# EAGLE board AIO (EAGLE 9.2.2)
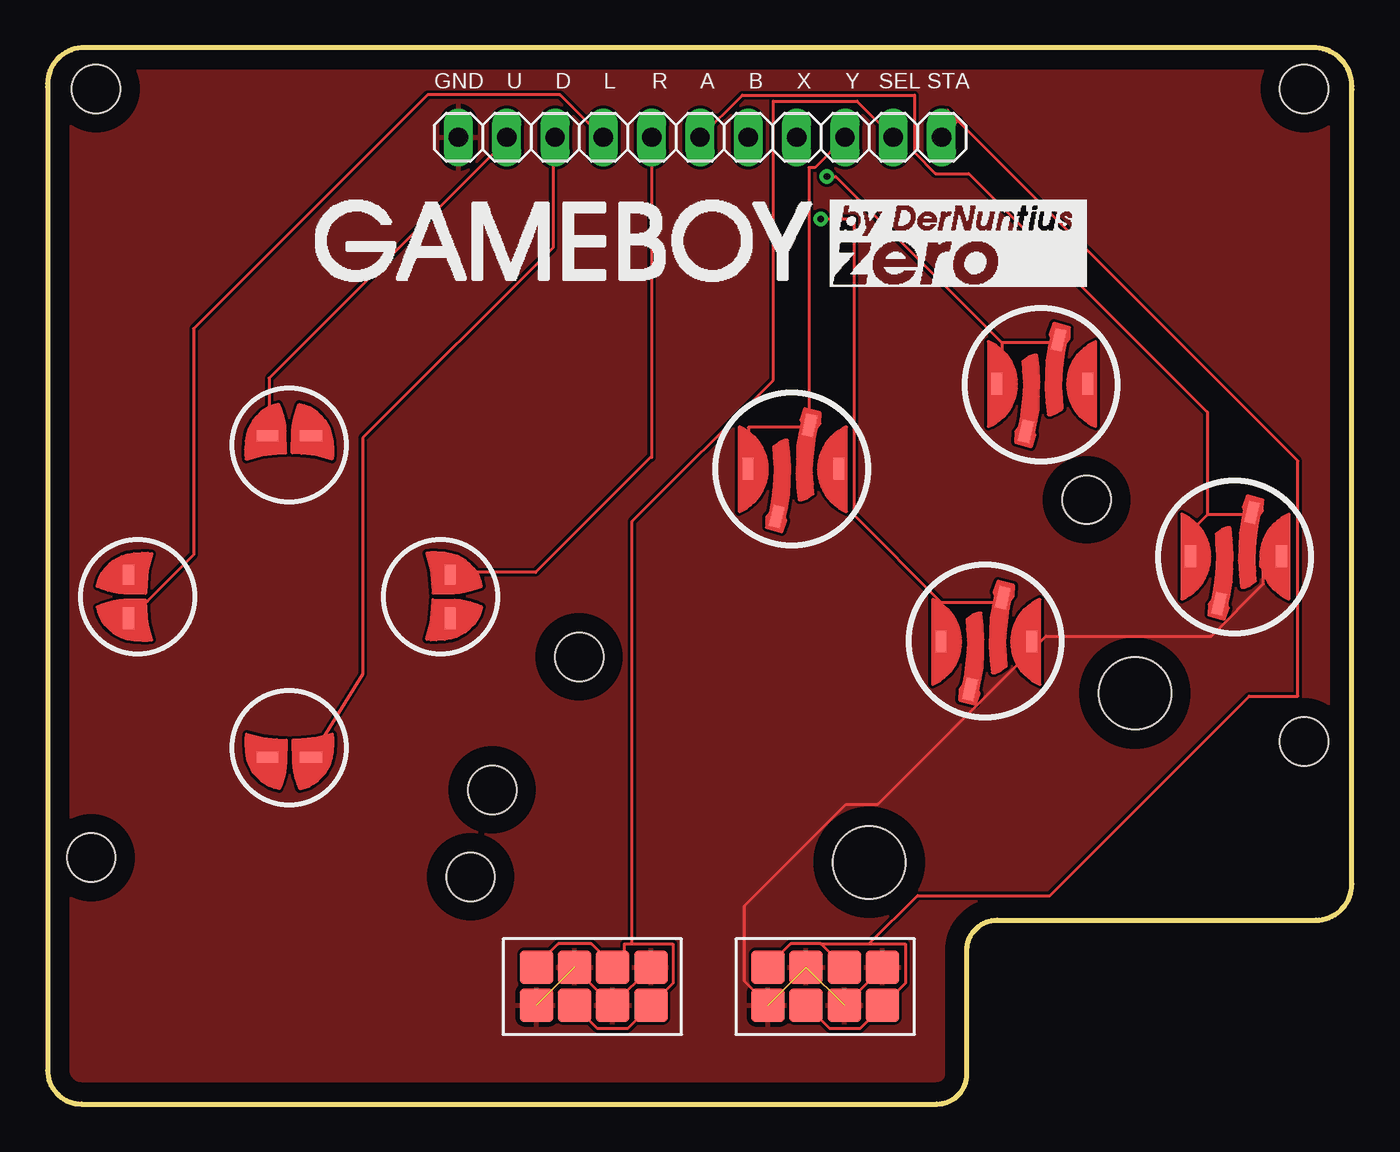
[diagram p0: board, top side]
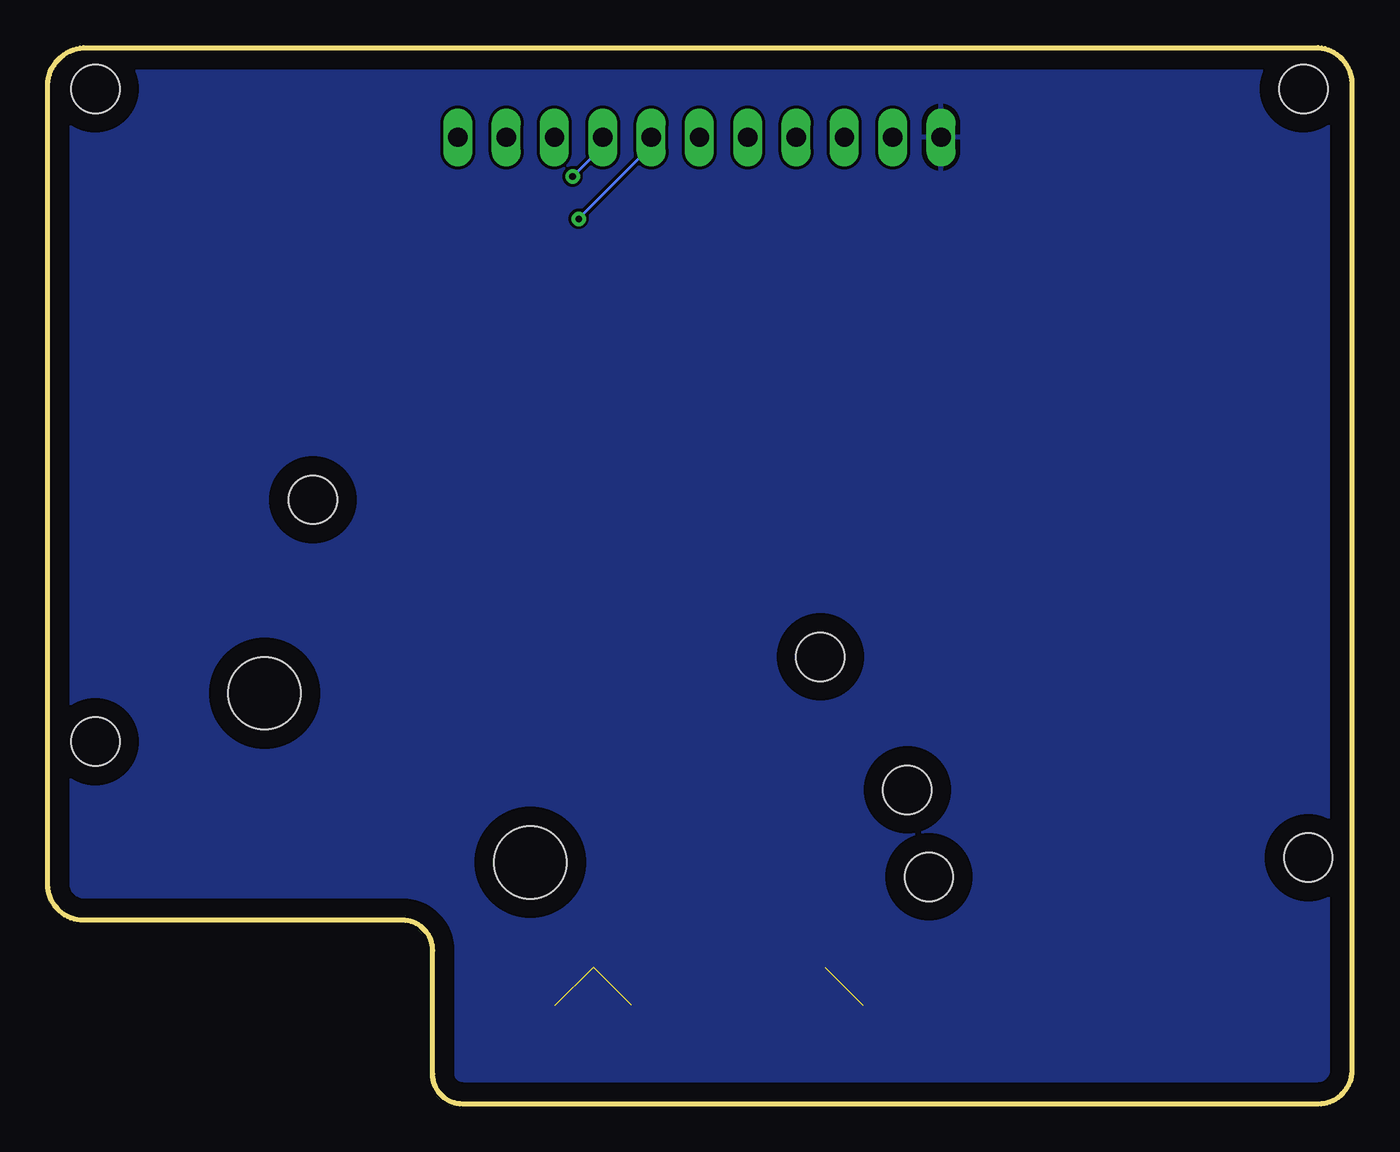
[diagram p1: board, bottom side, seen from below]

Size 68.56 x 55.51 mm. Coordinates in mm from the lower left corner, seen from the top.
Outline: 66.66,55.52 1.77,55.52 arc90 0.01,53.44 0.01,1.78 arc90 1.78,0 46.74,0 arc90 48.32,1.58 48.32,8.08 arc-90 49.9,9.66 66.67,9.66 arc90 68.56,11.55 68.56,53.32 arc90 66.66,55.52
Copper layers (1*16): Top 0.035mm / dielectric 1.5mm / Bottom 0.035mm
Design rules "default": minimum track width 6mil, minimum drill 0.35mm, track to track 6mil, track to pad 6mil, pad to pad 6mil, via to via 6mil, smd to smd 6mil, copper to edge 40mil, drill to drill 6mil, minimum pad ring 10mil, minimum via ring 8mil, stop-mask expansion 4mil, vias tented up to drill 0mil, thermal gap 10mil
Holes 2.54 mm at 22.23,11.94 2.29,12.95 23.37,16.51 66.05,19.05 54.62,31.75 2.55,53.34 66.05,53.34 27.95,23.5
Holes 3.81 mm at 43.19,12.7 57.16,21.59

## Footprints (pad centres in the part's own frame; a part is rotated, then mirrored left to right if it is on the bottom)
1X11 = drill 1.016 long: 1 -12.7,0; 2 -10.16,0; 3 -7.62,0; 4 -5.08,0; 5 -2.54,0; 6 0,0; 7 2.54,0; 8 5.08,0; 9 7.62,0; 10 10.16,0; 11 12.7,0
D-PAD = smd 1.039 x 0.574: DOWN 1.149,-8.444; GND@1 1.149,8.444 | smd 0.574 x 1.149: GND@2 -8.444,1.149; GND@4 8.444,-1.149; LEFT -8.444,-1.149; RIGHT 8.444,1.149 | smd 1.149 x 0.574: GND@3 -1.149,-8.444; UP -1.149,8.444
AB_BUTTON = smd 0.574 x 1.149: A@1 4.182,2.298; B@1 -8.915,-2.183; GND@2 -4.136,-2.183; GND@4 8.961,2.298 | smd 1.149 x 0.574 rotated 77: A@2 7.422,4.595; B@2 -5.675,0.115; GND@1 -7.399,-4.687; GND@3 5.698,-0.207
CONDUCTIVE_BUTTON_THICK_STARTSELECT = smd 1.75 x 1.75: P$ACTIVE 3,1; P$ACTIVE1 -1,1; P$ACTIVE2 -3,-1; P$ACTIVE3 1,-1; P$GND 1,1; P$GND1 -3,1; P$GND2 -1,-1; P$GND3 3,-1

## Placement (x,y rotation side)
GND  [1X11]  34.3,50.8 0 top
S1  D-PAD  [D-PAD]  12.71,26.67 90 top
S2  XY_BUTTON  [AB_BUTTON]  45.73,35.56 0 top
S3  AB_BUTTON  [AB_BUTTON]  55.89,26.49 0 top
SELECT  CONDUCTIVE_BUTTON_STARTSELECTCONDUCTIVE_BUTTON_THICK_STARTSELECT  [CONDUCTIVE_BUTTON_THICK_STARTSELECT]  28.71,6.2 0 top
START  CONDUCTIVE_BUTTON_STARTSELECTCONDUCTIVE_BUTTON_THICK_STARTSELECT  [CONDUCTIVE_BUTTON_THICK_STARTSELECT]  40.87,6.2 0 top

## Library data of the parts
GND = pinhead + SMD
S1-S3 = GBP AIO
SELECT START = 32teeth - Conductive Buttons v2

## Nets
A: GND.6 S3.A@1 S3.A@2
B: GND.7 S3.B@1 S3.B@2
DOWN: GND.3 S1.LEFT
GND: GND.1 S1.GND@1 S1.GND@2 S1.GND@3 S1.GND@4 S2.GND@1 S2.GND@2 S2.GND@3 S2.GND@4 S3.GND@1 S3.GND@2 S3.GND@3 S3.GND@4 SELECT.P$ACTIVE SELECT.P$ACTIVE1 SELECT.P$ACTIVE2 SELECT.P$ACTIVE3 START.P$ACTIVE START.P$ACTIVE1 START.P$ACTIVE2 START.P$ACTIVE3
LEFT: GND.4 S1.UP
RIGHT: GND.5 S1.DOWN
SELECT: GND.10 SELECT.P$GND SELECT.P$GND1 SELECT.P$GND2 SELECT.P$GND3
START: GND.11 START.P$GND START.P$GND1 START.P$GND2 START.P$GND3
UP: GND.2 S1.RIGHT
X: GND.8 S2.A@1 S2.A@2
Y: GND.9 S2.B@1 S2.B@2

## Tracks (layer width: path | path; a pad name or v marks a point on that pad's centre or on a via)
A
  Top 0.152: 60.07,30.06 60.07,30 | 60.07,30 S3.A@1 | 60.97,30.96 60.01,30 60.07,30 | 60.97,30.96 63.19,30.96 S3.A@2 | 60.97,30.96 60.97,36.35 48.42,48.89 46.68,48.89 45.57,50.01 45.57,53.02 36.52,53.02 GND.6
B  (via drill 0.35)
  Top 0.152: 47,26.35 47,24.45 S3.B@1 | 47,26.35 50.17,26.35 S3.B@2 | 47,26.35 42.39,30.96 42.39,46.51 v40.65,46.51
  Bottom 0.152: v40.65,46.51 36.84,50.32 GND.7
DOWN
  Top 0.152: S1.LEFT 16.57,22.58 16.57,35 26.57,45.01 26.57,50.8 GND.3
GND  (3 unrouted)
  Top 0.152: 54.93,37.78 S2.GND@4 | SELECT.P$ACTIVE 31.76,7.21 SELECT.P$ACTIVE3 | 29.77,5.23 SELECT.P$ACTIVE3 | SELECT.P$ACTIVE3 29.62,5.23 SELECT.P$ACTIVE1 | 63.76,28.85 63.76,29.01 64.83,29.01 64.83,29.16 64.67,29.16 64.67,29.31 64.83,29.31 65.13,29.01 65.13,28.7 64.98,28.55 63.76,28.55 63.76,28.25 63.91,28.09 63.91,27.33 61.17,24.59 52.48,24.59 43.64,15.75 41.97,15.75 36.63,10.41 36.63,6.45 37.85,5.23 START.P$ACTIVE2 | START.P$ACTIVE 43.8,7.06 START.P$ACTIVE3 41.97,5.23
  pour Bottom: 76.21,114.3 76.21,-17.78 -5.07,-17.78 -5.07,111.76 -3.8,113.03 74.94,113.03
  pour Top: -7.61,111.76 -7.61,-19.05 74.94,-19.05 74.94,110.49 73.67,111.76 -6.34,111.76
LEFT
  Top 0.152: S1.UP 4.32,25.65 5.09,26.42 5.24,26.42 7.68,28.85 7.68,40.74 19.97,53.03 26.93,53.03 29.16,50.8 GND.4
RIGHT
  Top 0.152: GND.5 31.76,34.04 | 31.76,34.04 31.76,33.97 | 31.76,34.04 25.66,27.94 21.24,27.94 S1.DOWN
SELECT
  Top 0.152: SELECT.P$GND2 27.79,5.08 28.9,3.97 30.49,3.97 31.6,5.08 SELECT.P$GND3 31.76,5.24 32.87,6.35 32.87,8.41 30.73,8.41 | SELECT.P$GND1 25.72,7.3 26.83,8.41 28.58,8.41 29.69,7.3 SELECT.P$GND 29.85,7.3 30.33,7.3 30.33,8.41 30.73,8.41 | GND.10 42.55,52.7 38.15,52.7 38.15,38.04 30.73,30.62 30.73,8.41
START
  Top 0.152: START.P$GND2 40.01,5.08 41.12,3.97 42.71,3.97 43.82,5.08 START.P$GND3 43.98,5.24 45.09,6.35 45.09,8.41 43.19,8.41 | 40.65,8.41 39.06,8.41 37.95,7.3 START.P$GND1 | 40.65,8.41 41.76,7.3 START.P$GND | 47.86,51.66 65.73,33.8 65.73,21.43 63.16,21.43 52.69,10.95 45.73,10.95 43.19,8.41 | 47.86,51.66 47.3,52.22 | 40.65,8.41 43.19,8.41 | 47.86,51.66 GND.11 | 47.91,51.71 47.86,51.66
UP
  Top 0.152: 24.14,50.7 GND.2 24.14,50.65 11.64,38.15 11.64,35.25 S1.RIGHT
X  (via drill 0.35)
  Top 0.152: 50.17,40 50.17,38.1 S2.A@1 | 50.17,40 53.03,40 S2.A@2 | 50.17,40 41.44,48.74 v40.96,48.74
  Bottom 0.152: v40.96,48.74 39.38,50.32 GND.8
Y
  Top 0.152: S2.B@1 36.84,33.66 36.84,35.56 40.01,35.56 S2.B@2 40.01,35.72 40.01,49.21 40.33,49.21 GND.9

## Text on the board
tNames: GND | U | D | L | R | A | B | X | Y | SEL | STA